# Altium PCB AVR精简学习板.PcbDoc (part 8 of 10)
Units mm, origin at the board's own origin, x right, y up, seen from the top; angles counter-clockwise.
Board outline 152.4 x 101.6 mm, 2 copper layers (Top Layer, Bottom Layer); 44 components, 51 nets, 211 pads, 6 vias.
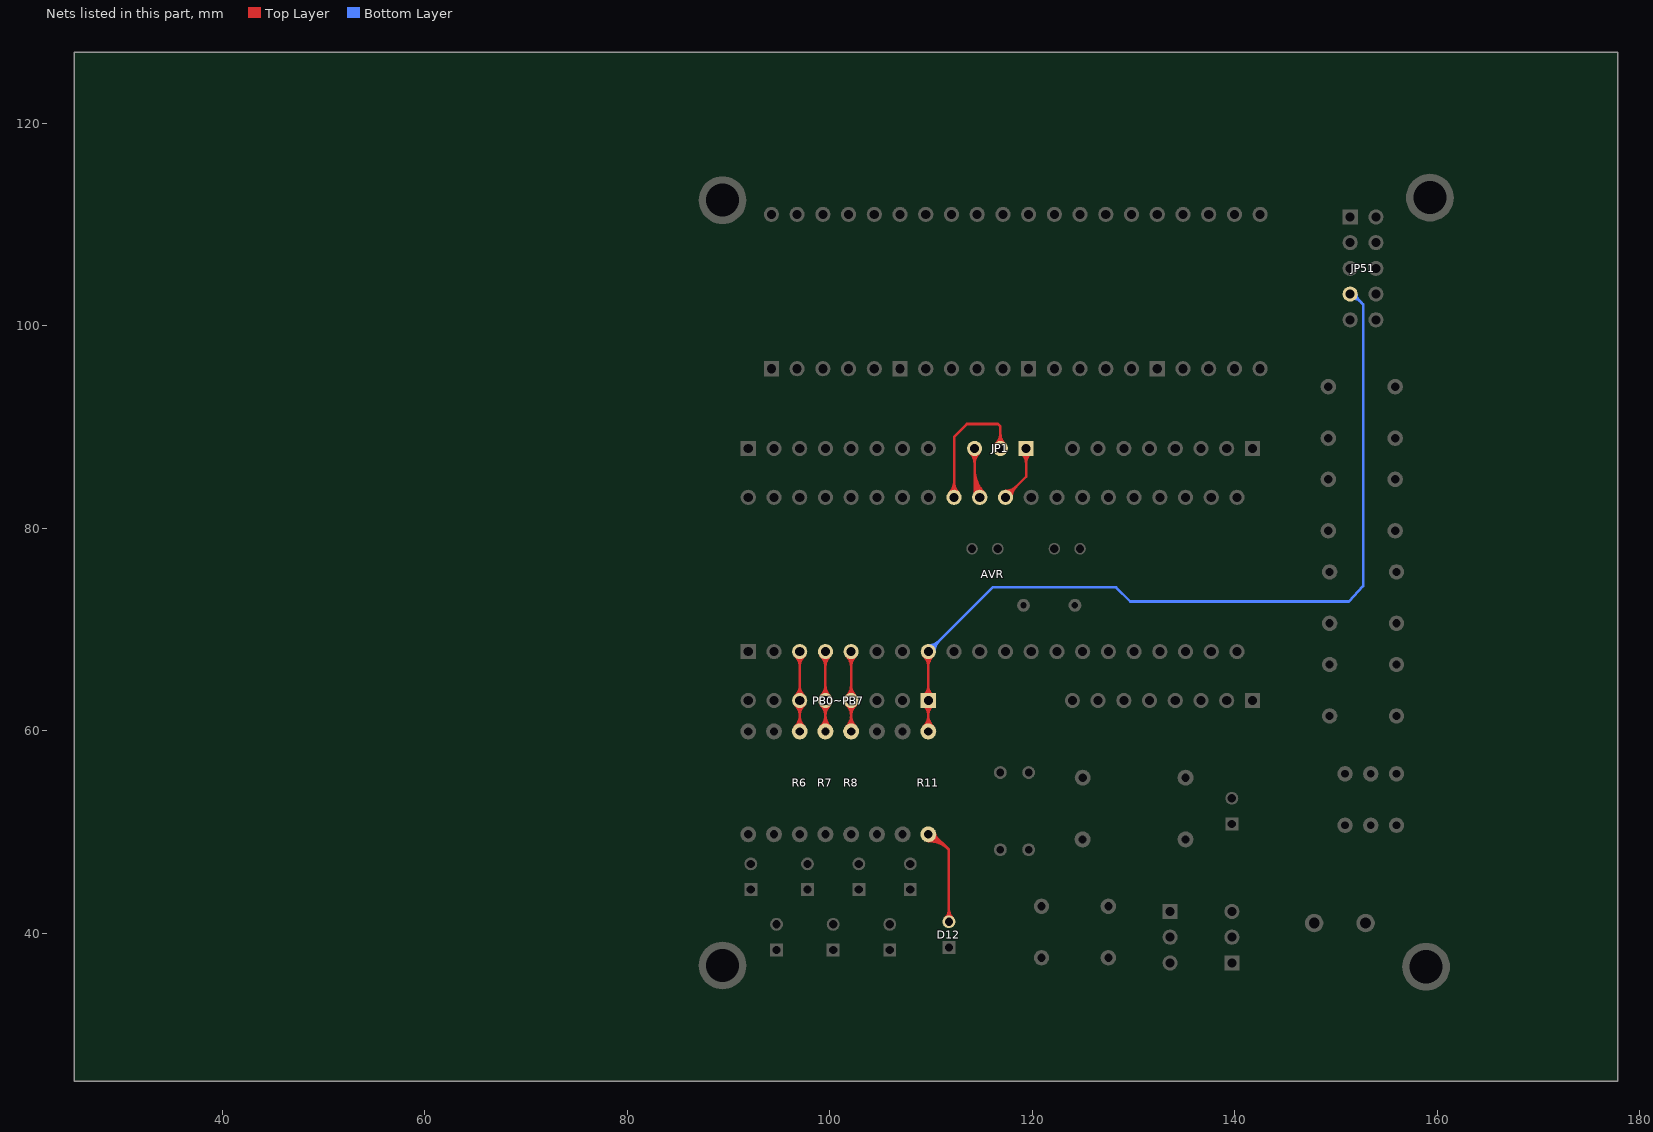
[diagram p8: the nets of this part, all layers, seen from the top]

## Via types
v1: diameter 1.27, hole 0.711, Top Layer to Bottom Layer, 6 vias

## Nets (pads, with @x,y where several pads share a name; then routed paths per layer and width w, separated by ;. In a path a pad name is that pad's centre, name@x,y a point inside that pad or via, vN(x,y) a via of type N, cw(c..) or ccw(c..) an arc to the next point about the centre after c; other vN are vias at no path point) (continued)
NetD12_2: D12.2 R11.1 | length 61.8
  Top Layer w0.254: R11.1@109.729,49.78 110.24,49.78 111.76,48.26 D12.2@111.76,41.148 ; R11.1@109.729,49.12 cw(c109.729,46.292) 111.728,48.292 ; R11.1@109.729,49.12 cw(c109.729,46.292) 111.728,48.292 ; R11.1@109.729,49.12 cw(c109.729,46.292) 111.728,48.292 ; R11.1@109.729,49.12 cw(c109.729,46.292) 111.728,48.292 ; R11.1@109.729,49.12 cw(c109.729,46.292) 111.728,48.292 ; R11.1@109.729,49.12 cw(c109.729,46.292) 111.728,48.292 ; R11.1@109.729,49.12 cw(c109.729,46.292) 111.728,48.292 ; R11.1@109.729,49.374 cw(c109.729,47.159) 111.295,48.725 ; R11.1@109.729,49.374 cw(c109.729,47.159) 111.295,48.725 ; R11.1@109.729,49.374 cw(c109.729,47.159) 111.295,48.725 ; R11.1@109.729,49.374 cw(c109.729,47.159) 111.295,48.725 ; R11.1@109.729,49.374 cw(c109.729,47.159) 111.295,48.725 ; R11.1@109.729,49.374 cw(c109.729,47.159) 111.295,48.725 ; R11.1@109.729,49.374 cw(c109.729,47.159) 111.295,48.725 ; R11.1@109.729,49.628 cw(c109.729,48.027) 110.861,49.159 ; R11.1@109.729,49.628 cw(c109.729,48.027) 110.861,49.159 ; R11.1@109.729,49.628 cw(c109.729,48.027) 110.861,49.159 ; R11.1@109.729,49.628 cw(c109.729,48.027) 110.861,49.159 ; R11.1@109.729,49.628 cw(c109.729,48.027) 110.861,49.159 ; R11.1@109.729,49.628 cw(c109.729,48.027) 110.861,49.159 ; R11.1@109.729,49.628 cw(c109.729,48.027) 110.861,49.159 ; R11.1@110.389,49.78 ccw(c110.751,49.78) 110.495,49.525 ; R11.1@110.389,49.78 ccw(c110.751,49.78) 110.495,49.525 ; R11.1@110.389,49.78 ccw(c110.751,49.78) 110.495,49.525 ; R11.1@110.389,49.78 ccw(c110.751,49.78) 110.495,49.525 ; R11.1@110.389,49.78 ccw(c110.751,49.78) 110.495,49.525 ; R11.1@110.389,49.78 ccw(c110.751,49.78) 110.495,49.525 ; R11.1@110.389,49.78 ccw(c110.751,49.78) 110.495,49.525 ; D12.2@111.401,41.507 ccw(c110.534,42.374) 111.76,42.374 ; D12.2@111.401,41.507 ccw(c110.534,42.374) 111.76,42.374 ; D12.2@111.401,41.507 ccw(c110.534,42.374) 111.76,42.374 ; D12.2@111.401,41.507 ccw(c110.534,42.374) 111.76,42.374 ; D12.2@111.401,41.507 ccw(c110.534,42.374) 111.76,42.374 ; D12.2@111.401,41.507 ccw(c110.534,42.374) 111.76,42.374 ; D12.2@111.401,41.507 ccw(c110.534,42.374) 111.76,42.374 ; 111.76,42.374 ccw(c112.986,42.374) D12.2@112.119,41.507 ; 111.76,42.374 ccw(c112.986,42.374) D12.2@112.119,41.507 ; 111.76,42.374 ccw(c112.986,42.374) D12.2@112.119,41.507 ; 111.76,42.374 ccw(c112.986,42.374) D12.2@112.119,41.507 ; 111.76,42.374 ccw(c112.986,42.374) D12.2@112.119,41.507 ; 111.76,42.374 ccw(c112.986,42.374) D12.2@112.119,41.507 ; 111.76,42.374 ccw(c112.986,42.374) D12.2@112.119,41.507
NetJP1_1: AVR.30 JP1.1 | length 58.3
  Top Layer w0.254: AVR.30@117.348,83.058 119.38,85.09 JP1.1@119.38,87.884 ; AVR.30@117.348,83.427 ccw(c117.348,84.318) 117.978,83.688 ; AVR.30@117.348,83.427 ccw(c117.348,84.318) 117.978,83.688 ; AVR.30@117.348,83.427 ccw(c117.348,84.318) 117.978,83.688 ; AVR.30@117.348,83.427 ccw(c117.348,84.318) 117.978,83.688 ; AVR.30@117.348,83.427 ccw(c117.348,84.318) 117.978,83.688 ; AVR.30@117.348,83.427 ccw(c117.348,84.318) 117.978,83.688 ; AVR.30@117.348,83.427 ccw(c117.348,84.318) 117.978,83.688 ; AVR.30@117.348,83.681 ccw(c117.348,85.185) 118.412,84.122 ; AVR.30@117.348,83.681 ccw(c117.348,85.185) 118.412,84.122 ; AVR.30@117.348,83.681 ccw(c117.348,85.185) 118.412,84.122 ; AVR.30@117.348,83.681 ccw(c117.348,85.185) 118.412,84.122 ; AVR.30@117.348,83.681 ccw(c117.348,85.185) 118.412,84.122 ; AVR.30@117.348,83.681 ccw(c117.348,85.185) 118.412,84.122 ; AVR.30@117.348,83.681 ccw(c117.348,85.185) 118.412,84.122 ; AVR.30@117.717,83.058 cw(c118.608,83.058) 117.978,83.688 ; AVR.30@117.717,83.058 cw(c118.608,83.058) 117.978,83.688 ; AVR.30@117.717,83.058 cw(c118.608,83.058) 117.978,83.688 ; AVR.30@117.717,83.058 cw(c118.608,83.058) 117.978,83.688 ; AVR.30@117.717,83.058 cw(c118.608,83.058) 117.978,83.688 ; AVR.30@117.717,83.058 cw(c118.608,83.058) 117.978,83.688 ; AVR.30@117.717,83.058 cw(c118.608,83.058) 117.978,83.688 ; AVR.30@117.971,83.058 cw(c119.475,83.058) 118.412,84.122 ; AVR.30@117.971,83.058 cw(c119.475,83.058) 118.412,84.122 ; AVR.30@117.971,83.058 cw(c119.475,83.058) 118.412,84.122 ; AVR.30@117.971,83.058 cw(c119.475,83.058) 118.412,84.122 ; AVR.30@117.971,83.058 cw(c119.475,83.058) 118.412,84.122 ; AVR.30@117.971,83.058 cw(c119.475,83.058) 118.412,84.122 ; AVR.30@117.971,83.058 cw(c119.475,83.058) 118.412,84.122 ; JP1.1@118.939,87.443 cw(c117.876,86.38) 119.38,86.38 ; JP1.1@118.939,87.443 cw(c117.876,86.38) 119.38,86.38 ; JP1.1@118.939,87.443 cw(c117.876,86.38) 119.38,86.38 ; JP1.1@118.939,87.443 cw(c117.876,86.38) 119.38,86.38 ; JP1.1@118.939,87.443 cw(c117.876,86.38) 119.38,86.38 ; JP1.1@118.939,87.443 cw(c117.876,86.38) 119.38,86.38 ; JP1.1@118.939,87.443 cw(c117.876,86.38) 119.38,86.38 ; JP1.1@119.119,87.623 cw(c118.489,86.993) 119.38,86.993 ; JP1.1@119.119,87.623 cw(c118.489,86.993) 119.38,86.993 ; JP1.1@119.119,87.623 cw(c118.489,86.993) 119.38,86.993 ; JP1.1@119.119,87.623 cw(c118.489,86.993) 119.38,86.993 ; JP1.1@119.119,87.623 cw(c118.489,86.993) 119.38,86.993 ; JP1.1@119.119,87.623 cw(c118.489,86.993) 119.38,86.993 ; JP1.1@119.119,87.623 cw(c118.489,86.993) 119.38,86.993 ; 119.38,86.38 cw(c120.884,86.38) JP1.1@119.821,87.443 ; 119.38,86.38 cw(c120.884,86.38) JP1.1@119.821,87.443 ; 119.38,86.38 cw(c120.884,86.38) JP1.1@119.821,87.443 ; 119.38,86.38 cw(c120.884,86.38) JP1.1@119.821,87.443 ; 119.38,86.38 cw(c120.884,86.38) JP1.1@119.821,87.443 ; 119.38,86.38 cw(c120.884,86.38) JP1.1@119.821,87.443 ; 119.38,86.38 cw(c120.884,86.38) JP1.1@119.821,87.443 ; 119.38,86.993 cw(c120.271,86.993) JP1.1@119.641,87.623 ; 119.38,86.993 cw(c120.271,86.993) JP1.1@119.641,87.623 ; 119.38,86.993 cw(c120.271,86.993) JP1.1@119.641,87.623 ; 119.38,86.993 cw(c120.271,86.993) JP1.1@119.641,87.623 ; 119.38,86.993 cw(c120.271,86.993) JP1.1@119.641,87.623 ; 119.38,86.993 cw(c120.271,86.993) JP1.1@119.641,87.623 ; 119.38,86.993 cw(c120.271,86.993) JP1.1@119.641,87.623
NetJP1_2: AVR.32 JP1.2 | length 66
  Top Layer w0.254: AVR.32@112.268,83.058 112.268,89.027 113.538,90.297 116.586,90.297 116.84,90.043 JP1.2@116.84,87.884 ; AVR.32@111.827,83.499 ccw(c110.764,84.562) 112.268,84.562 ; AVR.32@111.827,83.499 ccw(c110.764,84.562) 112.268,84.562 ; AVR.32@111.827,83.499 ccw(c110.764,84.562) 112.268,84.562 ; AVR.32@111.827,83.499 ccw(c110.764,84.562) 112.268,84.562 ; AVR.32@111.827,83.499 ccw(c110.764,84.562) 112.268,84.562 ; AVR.32@111.827,83.499 ccw(c110.764,84.562) 112.268,84.562 ; AVR.32@111.827,83.499 ccw(c110.764,84.562) 112.268,84.562 ; AVR.32@112.007,83.319 ccw(c111.377,83.949) 112.268,83.949 ; AVR.32@112.007,83.319 ccw(c111.377,83.949) 112.268,83.949 ; AVR.32@112.007,83.319 ccw(c111.377,83.949) 112.268,83.949 ; AVR.32@112.007,83.319 ccw(c111.377,83.949) 112.268,83.949 ; AVR.32@112.007,83.319 ccw(c111.377,83.949) 112.268,83.949 ; AVR.32@112.007,83.319 ccw(c111.377,83.949) 112.268,83.949 ; AVR.32@112.007,83.319 ccw(c111.377,83.949) 112.268,83.949 ; 112.268,83.949 ccw(c113.159,83.949) AVR.32@112.529,83.319 ; 112.268,83.949 ccw(c113.159,83.949) AVR.32@112.529,83.319 ; 112.268,83.949 ccw(c113.159,83.949) AVR.32@112.529,83.319 ; 112.268,83.949 ccw(c113.159,83.949) AVR.32@112.529,83.319 ; 112.268,83.949 ccw(c113.159,83.949) AVR.32@112.529,83.319 ; 112.268,83.949 ccw(c113.159,83.949) AVR.32@112.529,83.319 ; 112.268,83.949 ccw(c113.159,83.949) AVR.32@112.529,83.319 ; 112.268,84.562 ccw(c113.772,84.562) AVR.32@112.709,83.499 ; 112.268,84.562 ccw(c113.772,84.562) AVR.32@112.709,83.499 ; 112.268,84.562 ccw(c113.772,84.562) AVR.32@112.709,83.499 ; 112.268,84.562 ccw(c113.772,84.562) AVR.32@112.709,83.499 ; 112.268,84.562 ccw(c113.772,84.562) AVR.32@112.709,83.499 ; 112.268,84.562 ccw(c113.772,84.562) AVR.32@112.709,83.499 ; 112.268,84.562 ccw(c113.772,84.562) AVR.32@112.709,83.499 ; JP1.2@116.399,88.325 ccw(c115.336,89.388) 116.84,89.388 ; JP1.2@116.399,88.325 ccw(c115.336,89.388) 116.84,89.388 ; JP1.2@116.399,88.325 ccw(c115.336,89.388) 116.84,89.388 ; JP1.2@116.399,88.325 ccw(c115.336,89.388) 116.84,89.388 ; JP1.2@116.399,88.325 ccw(c115.336,89.388) 116.84,89.388 ; JP1.2@116.399,88.325 ccw(c115.336,89.388) 116.84,89.388 ; JP1.2@116.399,88.325 ccw(c115.336,89.388) 116.84,89.388 ; JP1.2@116.579,88.145 ccw(c115.949,88.775) 116.84,88.775 ; JP1.2@116.579,88.145 ccw(c115.949,88.775) 116.84,88.775 ; JP1.2@116.579,88.145 ccw(c115.949,88.775) 116.84,88.775 ; JP1.2@116.579,88.145 ccw(c115.949,88.775) 116.84,88.775 ; JP1.2@116.579,88.145 ccw(c115.949,88.775) 116.84,88.775 ; JP1.2@116.579,88.145 ccw(c115.949,88.775) 116.84,88.775 ; JP1.2@116.579,88.145 ccw(c115.949,88.775) 116.84,88.775 ; 116.84,88.775 ccw(c117.731,88.775) JP1.2@117.101,88.145 ; 116.84,88.775 ccw(c117.731,88.775) JP1.2@117.101,88.145 ; 116.84,88.775 ccw(c117.731,88.775) JP1.2@117.101,88.145 ; 116.84,88.775 ccw(c117.731,88.775) JP1.2@117.101,88.145 ; 116.84,88.775 ccw(c117.731,88.775) JP1.2@117.101,88.145 ; 116.84,88.775 ccw(c117.731,88.775) JP1.2@117.101,88.145 ; 116.84,88.775 ccw(c117.731,88.775) JP1.2@117.101,88.145 ; 116.84,89.388 ccw(c118.344,89.388) JP1.2@117.281,88.325 ; 116.84,89.388 ccw(c118.344,89.388) JP1.2@117.281,88.325 ; 116.84,89.388 ccw(c118.344,89.388) JP1.2@117.281,88.325 ; 116.84,89.388 ccw(c118.344,89.388) JP1.2@117.281,88.325 ; 116.84,89.388 ccw(c118.344,89.388) JP1.2@117.281,88.325 ; 116.84,89.388 ccw(c118.344,89.388) JP1.2@117.281,88.325 ; 116.84,89.388 ccw(c118.344,89.388) JP1.2@117.281,88.325
NetJP1_3: AVR.31 JP1.3 | length 82.4
  Top Layer w0.254: JP1.3@114.3,87.884 114.3,83.566 AVR.31@114.808,83.058 ; JP1.3@113.859,87.443 cw(c112.796,86.38) 114.3,86.38 ; JP1.3@113.859,87.443 cw(c112.796,86.38) 114.3,86.38 ; JP1.3@113.859,87.443 cw(c112.796,86.38) 114.3,86.38 ; JP1.3@113.859,87.443 cw(c112.796,86.38) 114.3,86.38 ; JP1.3@113.859,87.443 cw(c112.796,86.38) 114.3,86.38 ; JP1.3@113.859,87.443 cw(c112.796,86.38) 114.3,86.38 ; JP1.3@113.859,87.443 cw(c112.796,86.38) 114.3,86.38 ; JP1.3@114.039,87.623 cw(c113.409,86.993) 114.3,86.993 ; JP1.3@114.039,87.623 cw(c113.409,86.993) 114.3,86.993 ; JP1.3@114.039,87.623 cw(c113.409,86.993) 114.3,86.993 ; JP1.3@114.039,87.623 cw(c113.409,86.993) 114.3,86.993 ; JP1.3@114.039,87.623 cw(c113.409,86.993) 114.3,86.993 ; JP1.3@114.039,87.623 cw(c113.409,86.993) 114.3,86.993 ; JP1.3@114.039,87.623 cw(c113.409,86.993) 114.3,86.993 ; 114.3,83.949 ccw(c115.699,83.949) AVR.31@114.71,82.96 ; 114.3,83.949 ccw(c115.699,83.949) AVR.31@114.71,82.96 ; 114.3,83.949 ccw(c115.699,83.949) AVR.31@114.71,82.96 ; 114.3,83.949 ccw(c115.699,83.949) AVR.31@114.71,82.96 ; 114.3,83.949 ccw(c115.699,83.949) AVR.31@114.71,82.96 ; 114.3,83.949 ccw(c115.699,83.949) AVR.31@114.71,82.96 ; 114.3,83.949 ccw(c115.699,83.949) AVR.31@114.71,82.96 ; 114.3,84.562 ccw(c116.312,84.562) AVR.31@114.889,83.139 ; 114.3,84.562 ccw(c116.312,84.562) AVR.31@114.889,83.139 ; 114.3,84.562 ccw(c116.312,84.562) AVR.31@114.889,83.139 ; 114.3,84.562 ccw(c116.312,84.562) AVR.31@114.889,83.139 ; 114.3,84.562 ccw(c116.312,84.562) AVR.31@114.889,83.139 ; 114.3,84.562 ccw(c116.312,84.562) AVR.31@114.889,83.139 ; 114.3,84.562 ccw(c116.312,84.562) AVR.31@114.889,83.139 ; 114.3,85.175 ccw(c116.925,85.175) AVR.31@115.069,83.319 ; 114.3,85.175 ccw(c116.925,85.175) AVR.31@115.069,83.319 ; 114.3,85.175 ccw(c116.925,85.175) AVR.31@115.069,83.319 ; 114.3,85.175 ccw(c116.925,85.175) AVR.31@115.069,83.319 ; 114.3,85.175 ccw(c116.925,85.175) AVR.31@115.069,83.319 ; 114.3,85.175 ccw(c116.925,85.175) AVR.31@115.069,83.319 ; 114.3,85.175 ccw(c116.925,85.175) AVR.31@115.069,83.319 ; 114.3,85.788 ccw(c117.538,85.788) AVR.31@115.249,83.499 ; 114.3,85.788 ccw(c117.538,85.788) AVR.31@115.249,83.499 ; 114.3,85.788 ccw(c117.538,85.788) AVR.31@115.249,83.499 ; 114.3,85.788 ccw(c117.538,85.788) AVR.31@115.249,83.499 ; 114.3,85.788 ccw(c117.538,85.788) AVR.31@115.249,83.499 ; 114.3,85.788 ccw(c117.538,85.788) AVR.31@115.249,83.499 ; 114.3,85.788 ccw(c117.538,85.788) AVR.31@115.249,83.499 ; 114.3,86.38 cw(c115.804,86.38) JP1.3@114.741,87.443 ; 114.3,86.38 cw(c115.804,86.38) JP1.3@114.741,87.443 ; 114.3,86.38 cw(c115.804,86.38) JP1.3@114.741,87.443 ; 114.3,86.38 cw(c115.804,86.38) JP1.3@114.741,87.443 ; 114.3,86.38 cw(c115.804,86.38) JP1.3@114.741,87.443 ; 114.3,86.38 cw(c115.804,86.38) JP1.3@114.741,87.443 ; 114.3,86.38 cw(c115.804,86.38) JP1.3@114.741,87.443 ; 114.3,86.993 cw(c115.191,86.993) JP1.3@114.561,87.623 ; 114.3,86.993 cw(c115.191,86.993) JP1.3@114.561,87.623 ; 114.3,86.993 cw(c115.191,86.993) JP1.3@114.561,87.623 ; 114.3,86.993 cw(c115.191,86.993) JP1.3@114.561,87.623 ; 114.3,86.993 cw(c115.191,86.993) JP1.3@114.561,87.623 ; 114.3,86.993 cw(c115.191,86.993) JP1.3@114.561,87.623 ; 114.3,86.993 cw(c115.191,86.993) JP1.3@114.561,87.623
NetJP2_1: AVR.8 JP51.7 PB0~PB7.1 R11.2 | length 236
  Top Layer w0.254: AVR.8@109.728,67.818 PB0~PB7.1@109.728,62.992 PB0~PB7.1@109.728,62.992 R11.2@109.729,59.94 ; R11.2@109.262,60.407 ccw(c108.135,61.535) 109.729,61.535 ; R11.2@109.262,60.407 ccw(c108.135,61.535) 109.729,61.535 ; R11.2@109.262,60.407 ccw(c108.135,61.535) 109.729,61.535 ; R11.2@109.262,60.407 ccw(c108.135,61.535) 109.729,61.535 ; R11.2@109.262,60.407 ccw(c108.135,61.535) 109.729,61.535 ; R11.2@109.262,60.407 ccw(c108.135,61.535) 109.729,61.535 ; R11.2@109.262,60.407 ccw(c108.135,61.535) 109.729,61.535 ; PB0~PB7.1@109.287,62.551 cw(c108.222,61.486) 109.729,61.486 ; PB0~PB7.1@109.287,62.551 cw(c108.222,61.486) 109.729,61.486 ; PB0~PB7.1@109.287,62.551 cw(c108.222,61.486) 109.729,61.486 ; PB0~PB7.1@109.287,62.551 cw(c108.222,61.486) 109.729,61.486 ; PB0~PB7.1@109.287,62.551 cw(c108.222,61.486) 109.729,61.486 ; PB0~PB7.1@109.287,62.551 cw(c108.222,61.486) 109.729,61.486 ; PB0~PB7.1@109.287,62.551 cw(c108.222,61.486) 109.729,61.486 ; PB0~PB7.1@109.287,63.433 ccw(c108.224,64.496) 109.728,64.496 ; PB0~PB7.1@109.287,63.433 ccw(c108.224,64.496) 109.728,64.496 ; PB0~PB7.1@109.287,63.433 ccw(c108.224,64.496) 109.728,64.496 ; PB0~PB7.1@109.287,63.433 ccw(c108.224,64.496) 109.728,64.496 ; PB0~PB7.1@109.287,63.433 ccw(c108.224,64.496) 109.728,64.496 ; PB0~PB7.1@109.287,63.433 ccw(c108.224,64.496) 109.728,64.496 ; PB0~PB7.1@109.287,63.433 ccw(c108.224,64.496) 109.728,64.496 ; AVR.8@109.287,67.377 cw(c108.224,66.314) 109.728,66.314 ; AVR.8@109.287,67.377 cw(c108.224,66.314) 109.728,66.314 ; AVR.8@109.287,67.377 cw(c108.224,66.314) 109.728,66.314 ; AVR.8@109.287,67.377 cw(c108.224,66.314) 109.728,66.314 ; AVR.8@109.287,67.377 cw(c108.224,66.314) 109.728,66.314 ; AVR.8@109.287,67.377 cw(c108.224,66.314) 109.728,66.314 ; AVR.8@109.287,67.377 cw(c108.224,66.314) 109.728,66.314 ; R11.2@109.442,60.228 ccw(c108.748,60.921) 109.729,60.921 ; R11.2@109.442,60.228 ccw(c108.748,60.921) 109.729,60.921 ; R11.2@109.442,60.228 ccw(c108.748,60.921) 109.729,60.921 ; R11.2@109.442,60.228 ccw(c108.748,60.921) 109.729,60.921 ; R11.2@109.442,60.228 ccw(c108.748,60.921) 109.729,60.921 ; R11.2@109.442,60.228 ccw(c108.748,60.921) 109.729,60.921 ; R11.2@109.442,60.228 ccw(c108.748,60.921) 109.729,60.921 ; PB0~PB7.1@109.467,62.731 cw(c108.835,62.099) 109.729,62.099 ; PB0~PB7.1@109.467,62.731 cw(c108.835,62.099) 109.729,62.099 ; PB0~PB7.1@109.467,62.731 cw(c108.835,62.099) 109.729,62.099 ; PB0~PB7.1@109.467,62.731 cw(c108.835,62.099) 109.729,62.099 ; PB0~PB7.1@109.467,62.731 cw(c108.835,62.099) 109.729,62.099 ; PB0~PB7.1@109.467,62.731 cw(c108.835,62.099) 109.729,62.099 ; PB0~PB7.1@109.467,62.731 cw(c108.835,62.099) 109.729,62.099 ; PB0~PB7.1@109.467,63.253 ccw(c108.837,63.883) 109.728,63.883 ; PB0~PB7.1@109.467,63.253 ccw(c108.837,63.883) 109.728,63.883 ; PB0~PB7.1@109.467,63.253 ccw(c108.837,63.883) 109.728,63.883 ; PB0~PB7.1@109.467,63.253 ccw(c108.837,63.883) 109.728,63.883 ; PB0~PB7.1@109.467,63.253 ccw(c108.837,63.883) 109.728,63.883 ; PB0~PB7.1@109.467,63.253 ccw(c108.837,63.883) 109.728,63.883 ; PB0~PB7.1@109.467,63.253 ccw(c108.837,63.883) 109.728,63.883 ; AVR.8@109.467,67.557 cw(c108.837,66.927) 109.728,66.927 ; AVR.8@109.467,67.557 cw(c108.837,66.927) 109.728,66.927 ; AVR.8@109.467,67.557 cw(c108.837,66.927) 109.728,66.927 ; AVR.8@109.467,67.557 cw(c108.837,66.927) 109.728,66.927 ; AVR.8@109.467,67.557 cw(c108.837,66.927) 109.728,66.927 ; AVR.8@109.467,67.557 cw(c108.837,66.927) 109.728,66.927 ; AVR.8@109.467,67.557 cw(c108.837,66.927) 109.728,66.927 ; 109.728,63.883 ccw(c110.619,63.883) PB0~PB7.1@109.989,63.253 ; 109.728,63.883 ccw(c110.619,63.883) PB0~PB7.1@109.989,63.253 ; 109.728,63.883 ccw(c110.619,63.883) PB0~PB7.1@109.989,63.253 ; 109.728,63.883 ccw(c110.619,63.883) PB0~PB7.1@109.989,63.253 ; 109.728,63.883 ccw(c110.619,63.883) PB0~PB7.1@109.989,63.253 ; 109.728,63.883 ccw(c110.619,63.883) PB0~PB7.1@109.989,63.253 ; 109.728,63.883 ccw(c110.619,63.883) PB0~PB7.1@109.989,63.253 ; 109.728,64.496 ccw(c111.232,64.496) PB0~PB7.1@110.169,63.433 ; 109.728,64.496 ccw(c111.232,64.496) PB0~PB7.1@110.169,63.433 ; 109.728,64.496 ccw(c111.232,64.496) PB0~PB7.1@110.169,63.433 ; 109.728,64.496 ccw(c111.232,64.496) PB0~PB7.1@110.169,63.433 ; 109.728,64.496 ccw(c111.232,64.496) PB0~PB7.1@110.169,63.433 ; 109.728,64.496 ccw(c111.232,64.496) PB0~PB7.1@110.169,63.433 ; 109.728,64.496 ccw(c111.232,64.496) PB0~PB7.1@110.169,63.433 ; 109.728,66.314 cw(c111.232,66.314) AVR.8@110.169,67.377 ; 109.728,66.314 cw(c111.232,66.314) AVR.8@110.169,67.377 ; 109.728,66.314 cw(c111.232,66.314) AVR.8@110.169,67.377 ; 109.728,66.314 cw(c111.232,66.314) AVR.8@110.169,67.377 ; 109.728,66.314 cw(c111.232,66.314) AVR.8@110.169,67.377 ; 109.728,66.314 cw(c111.232,66.314) AVR.8@110.169,67.377 ; 109.728,66.314 cw(c111.232,66.314) AVR.8@110.169,67.377 ; 109.728,66.927 cw(c110.619,66.927) AVR.8@109.989,67.557 ; 109.728,66.927 cw(c110.619,66.927) AVR.8@109.989,67.557 ; 109.728,66.927 cw(c110.619,66.927) AVR.8@109.989,67.557 ; 109.728,66.927 cw(c110.619,66.927) AVR.8@109.989,67.557 ; 109.728,66.927 cw(c110.619,66.927) AVR.8@109.989,67.557 ; 109.728,66.927 cw(c110.619,66.927) AVR.8@109.989,67.557 ; 109.728,66.927 cw(c110.619,66.927) AVR.8@109.989,67.557 ; 109.729,60.921 ccw(c110.71,60.921) R11.2@110.016,60.228 ; 109.729,60.921 ccw(c110.71,60.921) R11.2@110.016,60.228 ; 109.729,60.921 ccw(c110.71,60.921) R11.2@110.016,60.228 ; 109.729,60.921 ccw(c110.71,60.921) R11.2@110.016,60.228 ; 109.729,60.921 ccw(c110.71,60.921) R11.2@110.016,60.228 ; 109.729,60.921 ccw(c110.71,60.921) R11.2@110.016,60.228 ; 109.729,60.921 ccw(c110.71,60.921) R11.2@110.016,60.228 ; 109.729,61.49 cw(c111.23,61.49) PB0~PB7.1@110.169,62.551 ; 109.729,61.49 cw(c111.23,61.49) PB0~PB7.1@110.169,62.551 ; 109.729,61.49 cw(c111.23,61.49) PB0~PB7.1@110.169,62.551 ; 109.729,61.49 cw(c111.23,61.49) PB0~PB7.1@110.169,62.551 ; 109.729,61.49 cw(c111.23,61.49) PB0~PB7.1@110.169,62.551 ; 109.729,61.49 cw(c111.23,61.49) PB0~PB7.1@110.169,62.551 ; 109.729,61.49 cw(c111.23,61.49) PB0~PB7.1@110.169,62.551 ; 109.729,61.535 ccw(c111.323,61.535) R11.2@110.196,60.407 ; 109.729,61.535 ccw(c111.323,61.535) R11.2@110.196,60.407 ; 109.729,61.535 ccw(c111.323,61.535) R11.2@110.196,60.407 ; 109.729,61.535 ccw(c111.323,61.535) R11.2@110.196,60.407 ; 109.729,61.535 ccw(c111.323,61.535) R11.2@110.196,60.407 ; 109.729,61.535 ccw(c111.323,61.535) R11.2@110.196,60.407 ; 109.729,61.535 ccw(c111.323,61.535) R11.2@110.196,60.407 ; 109.729,62.104 cw(c110.616,62.104) PB0~PB7.1@109.989,62.731 ; 109.729,62.104 cw(c110.616,62.104) PB0~PB7.1@109.989,62.731 ; 109.729,62.104 cw(c110.616,62.104) PB0~PB7.1@109.989,62.731 ; 109.729,62.104 cw(c110.616,62.104) PB0~PB7.1@109.989,62.731 ; 109.729,62.104 cw(c110.616,62.104) PB0~PB7.1@109.989,62.731 ; 109.729,62.104 cw(c110.616,62.104) PB0~PB7.1@109.989,62.731 ; 109.729,62.104 cw(c110.616,62.104) PB0~PB7.1@109.989,62.731
  Bottom Layer w0.254: AVR.8@109.728,67.818 116.078,74.168 128.27,74.168 129.667,72.771 151.257,72.771 152.654,74.295 152.654,102.108 151.638,103.251 151.765,103.124 JP51.7@151.384,103.124 ; AVR.8@109.728,68.187 ccw(c109.728,69.078) 110.358,68.448 ; AVR.8@109.728,68.187 ccw(c109.728,69.078) 110.358,68.448 ; AVR.8@109.728,68.187 ccw(c109.728,69.078) 110.358,68.448 ; AVR.8@109.728,68.187 ccw(c109.728,69.078) 110.358,68.448 ; AVR.8@109.728,68.187 ccw(c109.728,69.078) 110.358,68.448 ; AVR.8@109.728,68.187 ccw(c109.728,69.078) 110.358,68.448 ; AVR.8@109.728,68.187 ccw(c109.728,69.078) 110.358,68.448 ; AVR.8@109.728,68.441 ccw(c109.728,69.945) 110.792,68.882 ; AVR.8@109.728,68.441 ccw(c109.728,69.945) 110.792,68.882 ; AVR.8@109.728,68.441 ccw(c109.728,69.945) 110.792,68.882 ; AVR.8@109.728,68.441 ccw(c109.728,69.945) 110.792,68.882 ; AVR.8@109.728,68.441 ccw(c109.728,69.945) 110.792,68.882 ; AVR.8@109.728,68.441 ccw(c109.728,69.945) 110.792,68.882 ; AVR.8@109.728,68.441 ccw(c109.728,69.945) 110.792,68.882 ; AVR.8@110.097,67.818 cw(c110.988,67.818) 110.358,68.448 ; AVR.8@110.097,67.818 cw(c110.988,67.818) 110.358,68.448 ; AVR.8@110.097,67.818 cw(c110.988,67.818) 110.358,68.448 ; AVR.8@110.097,67.818 cw(c110.988,67.818) 110.358,68.448 ; AVR.8@110.097,67.818 cw(c110.988,67.818) 110.358,68.448 ; AVR.8@110.097,67.818 cw(c110.988,67.818) 110.358,68.448 ; AVR.8@110.097,67.818 cw(c110.988,67.818) 110.358,68.448 ; AVR.8@110.351,67.818 cw(c111.855,67.818) 110.792,68.882 ; AVR.8@110.351,67.818 cw(c111.855,67.818) 110.792,68.882 ; AVR.8@110.351,67.818 cw(c111.855,67.818) 110.792,68.882 ; AVR.8@110.351,67.818 cw(c111.855,67.818) 110.792,68.882 ; AVR.8@110.351,67.818 cw(c111.855,67.818) 110.792,68.882 ; AVR.8@110.351,67.818 cw(c111.855,67.818) 110.792,68.882 ; AVR.8@110.351,67.818 cw(c111.855,67.818) 110.792,68.882 ; JP51.7@151.388,103.009 cw(c151.42,102.047) 152.14,102.686 ; JP51.7@151.388,103.009 cw(c151.42,102.047) 152.14,102.686 ; JP51.7@151.388,103.009 cw(c151.42,102.047) 152.14,102.686 ; JP51.7@151.388,103.009 cw(c151.42,102.047) 152.14,102.686 ; JP51.7@151.388,103.009 cw(c151.42,102.047) 152.14,102.686 ; JP51.7@151.388,103.009 cw(c151.42,102.047) 152.14,102.686 ; JP51.7@151.388,103.009 cw(c151.42,102.047) 152.14,102.686 ; JP51.7@151.396,102.755 cw(c151.444,101.344) 152.499,102.282 ; JP51.7@151.396,102.755 cw(c151.444,101.344) 152.499,102.282 ; JP51.7@151.396,102.755 cw(c151.444,101.344) 152.499,102.282 ; JP51.7@151.396,102.755 cw(c151.444,101.344) 152.499,102.282 ; JP51.7@151.396,102.755 cw(c151.444,101.344) 152.499,102.282 ; JP51.7@151.396,102.755 cw(c151.444,101.344) 152.499,102.282 ; JP51.7@151.396,102.755 cw(c151.444,101.344) 152.499,102.282 ; JP51.7@152.006,103.087 ccw(c152.573,103.054) 152.148,102.677 ; JP51.7@152.006,103.087 ccw(c152.573,103.054) 152.148,102.677 ; JP51.7@152.006,103.087 ccw(c152.573,103.054) 152.148,102.677 ; JP51.7@152.006,103.087 ccw(c152.573,103.054) 152.148,102.677 ; JP51.7@152.006,103.087 ccw(c152.573,103.054) 152.148,102.677 ; JP51.7@152.006,103.087 ccw(c152.573,103.054) 152.148,102.677 ; JP51.7@152.006,103.087 ccw(c152.573,103.054) 152.148,102.677
NetJP2_4: AVR.5 PB0~PB7.4 R8.2 | length 115.2
  Top Layer w0.254: AVR.5@102.108,67.818 PB0~PB7.4@102.108,62.992 PB0~PB7.4@102.108,62.992 R8.2@102.109,59.94 ; R8.2@101.642,60.407 ccw(c100.515,61.535) 102.109,61.535 ; R8.2@101.642,60.407 ccw(c100.515,61.535) 102.109,61.535 ; R8.2@101.642,60.407 ccw(c100.515,61.535) 102.109,61.535 ; R8.2@101.642,60.407 ccw(c100.515,61.535) 102.109,61.535 ; R8.2@101.642,60.407 ccw(c100.515,61.535) 102.109,61.535 ; R8.2@101.642,60.407 ccw(c100.515,61.535) 102.109,61.535 ; R8.2@101.642,60.407 ccw(c100.515,61.535) 102.109,61.535 ; PB0~PB7.4@101.667,62.551 cw(c100.602,61.486) 102.109,61.486 ; PB0~PB7.4@101.667,62.551 cw(c100.602,61.486) 102.109,61.486 ; PB0~PB7.4@101.667,62.551 cw(c100.602,61.486) 102.109,61.486 ; PB0~PB7.4@101.667,62.551 cw(c100.602,61.486) 102.109,61.486 ; PB0~PB7.4@101.667,62.551 cw(c100.602,61.486) 102.109,61.486 ; PB0~PB7.4@101.667,62.551 cw(c100.602,61.486) 102.109,61.486 ; PB0~PB7.4@101.667,62.551 cw(c100.602,61.486) 102.109,61.486 ; PB0~PB7.4@101.667,63.433 ccw(c100.604,64.496) 102.108,64.496 ; PB0~PB7.4@101.667,63.433 ccw(c100.604,64.496) 102.108,64.496 ; PB0~PB7.4@101.667,63.433 ccw(c100.604,64.496) 102.108,64.496 ; PB0~PB7.4@101.667,63.433 ccw(c100.604,64.496) 102.108,64.496 ; PB0~PB7.4@101.667,63.433 ccw(c100.604,64.496) 102.108,64.496 ; PB0~PB7.4@101.667,63.433 ccw(c100.604,64.496) 102.108,64.496 ; PB0~PB7.4@101.667,63.433 ccw(c100.604,64.496) 102.108,64.496 ; AVR.5@101.667,67.377 cw(c100.604,66.314) 102.108,66.314 ; AVR.5@101.667,67.377 cw(c100.604,66.314) 102.108,66.314 ; AVR.5@101.667,67.377 cw(c100.604,66.314) 102.108,66.314 ; AVR.5@101.667,67.377 cw(c100.604,66.314) 102.108,66.314 ; AVR.5@101.667,67.377 cw(c100.604,66.314) 102.108,66.314 ; AVR.5@101.667,67.377 cw(c100.604,66.314) 102.108,66.314 ; AVR.5@101.667,67.377 cw(c100.604,66.314) 102.108,66.314 ; R8.2@101.822,60.228 ccw(c101.128,60.921) 102.109,60.921 ; R8.2@101.822,60.228 ccw(c101.128,60.921) 102.109,60.921 ; R8.2@101.822,60.228 ccw(c101.128,60.921) 102.109,60.921 ; R8.2@101.822,60.228 ccw(c101.128,60.921) 102.109,60.921 ; R8.2@101.822,60.228 ccw(c101.128,60.921) 102.109,60.921 ; R8.2@101.822,60.228 ccw(c101.128,60.921) 102.109,60.921 ; R8.2@101.822,60.228 ccw(c101.128,60.921) 102.109,60.921 ; PB0~PB7.4@101.847,62.731 cw(c101.215,62.099) 102.109,62.099 ; PB0~PB7.4@101.847,62.731 cw(c101.215,62.099) 102.109,62.099 ; PB0~PB7.4@101.847,62.731 cw(c101.215,62.099) 102.109,62.099 ; PB0~PB7.4@101.847,62.731 cw(c101.215,62.099) 102.109,62.099 ; PB0~PB7.4@101.847,62.731 cw(c101.215,62.099) 102.109,62.099 ; PB0~PB7.4@101.847,62.731 cw(c101.215,62.099) 102.109,62.099 ; PB0~PB7.4@101.847,62.731 cw(c101.215,62.099) 102.109,62.099 ; PB0~PB7.4@101.847,63.253 ccw(c101.217,63.883) 102.108,63.883 ; PB0~PB7.4@101.847,63.253 ccw(c101.217,63.883) 102.108,63.883 ; PB0~PB7.4@101.847,63.253 ccw(c101.217,63.883) 102.108,63.883 ; PB0~PB7.4@101.847,63.253 ccw(c101.217,63.883) 102.108,63.883 ; PB0~PB7.4@101.847,63.253 ccw(c101.217,63.883) 102.108,63.883 ; PB0~PB7.4@101.847,63.253 ccw(c101.217,63.883) 102.108,63.883 ; PB0~PB7.4@101.847,63.253 ccw(c101.217,63.883) 102.108,63.883 ; AVR.5@101.847,67.557 cw(c101.217,66.927) 102.108,66.927 ; AVR.5@101.847,67.557 cw(c101.217,66.927) 102.108,66.927 ; AVR.5@101.847,67.557 cw(c101.217,66.927) 102.108,66.927 ; AVR.5@101.847,67.557 cw(c101.217,66.927) 102.108,66.927 ; AVR.5@101.847,67.557 cw(c101.217,66.927) 102.108,66.927 ; AVR.5@101.847,67.557 cw(c101.217,66.927) 102.108,66.927 ; AVR.5@101.847,67.557 cw(c101.217,66.927) 102.108,66.927 ; 102.108,63.883 ccw(c102.999,63.883) PB0~PB7.4@102.369,63.253 ; 102.108,63.883 ccw(c102.999,63.883) PB0~PB7.4@102.369,63.253 ; 102.108,63.883 ccw(c102.999,63.883) PB0~PB7.4@102.369,63.253 ; 102.108,63.883 ccw(c102.999,63.883) PB0~PB7.4@102.369,63.253 ; 102.108,63.883 ccw(c102.999,63.883) PB0~PB7.4@102.369,63.253 ; 102.108,63.883 ccw(c102.999,63.883) PB0~PB7.4@102.369,63.253 ; 102.108,63.883 ccw(c102.999,63.883) PB0~PB7.4@102.369,63.253 ; 102.108,64.496 ccw(c103.612,64.496) PB0~PB7.4@102.549,63.433 ; 102.108,64.496 ccw(c103.612,64.496) PB0~PB7.4@102.549,63.433 ; 102.108,64.496 ccw(c103.612,64.496) PB0~PB7.4@102.549,63.433 ; 102.108,64.496 ccw(c103.612,64.496) PB0~PB7.4@102.549,63.433 ; 102.108,64.496 ccw(c103.612,64.496) PB0~PB7.4@102.549,63.433 ; 102.108,64.496 ccw(c103.612,64.496) PB0~PB7.4@102.549,63.433 ; 102.108,64.496 ccw(c103.612,64.496) PB0~PB7.4@102.549,63.433 ; 102.108,66.314 cw(c103.612,66.314) AVR.5@102.549,67.377 ; 102.108,66.314 cw(c103.612,66.314) AVR.5@102.549,67.377 ; 102.108,66.314 cw(c103.612,66.314) AVR.5@102.549,67.377 ; 102.108,66.314 cw(c103.612,66.314) AVR.5@102.549,67.377 ; 102.108,66.314 cw(c103.612,66.314) AVR.5@102.549,67.377 ; 102.108,66.314 cw(c103.612,66.314) AVR.5@102.549,67.377 ; 102.108,66.314 cw(c103.612,66.314) AVR.5@102.549,67.377 ; 102.108,66.927 cw(c102.999,66.927) AVR.5@102.369,67.557 ; 102.108,66.927 cw(c102.999,66.927) AVR.5@102.369,67.557 ; 102.108,66.927 cw(c102.999,66.927) AVR.5@102.369,67.557 ; 102.108,66.927 cw(c102.999,66.927) AVR.5@102.369,67.557 ; 102.108,66.927 cw(c102.999,66.927) AVR.5@102.369,67.557 ; 102.108,66.927 cw(c102.999,66.927) AVR.5@102.369,67.557 ; 102.108,66.927 cw(c102.999,66.927) AVR.5@102.369,67.557 ; 102.109,60.921 ccw(c103.09,60.921) R8.2@102.396,60.228 ; 102.109,60.921 ccw(c103.09,60.921) R8.2@102.396,60.228 ; 102.109,60.921 ccw(c103.09,60.921) R8.2@102.396,60.228 ; 102.109,60.921 ccw(c103.09,60.921) R8.2@102.396,60.228 ; 102.109,60.921 ccw(c103.09,60.921) R8.2@102.396,60.228 ; 102.109,60.921 ccw(c103.09,60.921) R8.2@102.396,60.228 ; 102.109,60.921 ccw(c103.09,60.921) R8.2@102.396,60.228 ; 102.109,61.49 cw(c103.61,61.49) PB0~PB7.4@102.549,62.551 ; 102.109,61.49 cw(c103.61,61.49) PB0~PB7.4@102.549,62.551 ; 102.109,61.49 cw(c103.61,61.49) PB0~PB7.4@102.549,62.551 ; 102.109,61.49 cw(c103.61,61.49) PB0~PB7.4@102.549,62.551 ; 102.109,61.49 cw(c103.61,61.49) PB0~PB7.4@102.549,62.551 ; 102.109,61.49 cw(c103.61,61.49) PB0~PB7.4@102.549,62.551 ; 102.109,61.49 cw(c103.61,61.49) PB0~PB7.4@102.549,62.551 ; 102.109,61.535 ccw(c103.703,61.535) R8.2@102.576,60.407 ; 102.109,61.535 ccw(c103.703,61.535) R8.2@102.576,60.407 ; 102.109,61.535 ccw(c103.703,61.535) R8.2@102.576,60.407 ; 102.109,61.535 ccw(c103.703,61.535) R8.2@102.576,60.407 ; 102.109,61.535 ccw(c103.703,61.535) R8.2@102.576,60.407 ; 102.109,61.535 ccw(c103.703,61.535) R8.2@102.576,60.407 ; 102.109,61.535 ccw(c103.703,61.535) R8.2@102.576,60.407 ; 102.109,62.104 cw(c102.996,62.104) PB0~PB7.4@102.369,62.731 ; 102.109,62.104 cw(c102.996,62.104) PB0~PB7.4@102.369,62.731 ; 102.109,62.104 cw(c102.996,62.104) PB0~PB7.4@102.369,62.731 ; 102.109,62.104 cw(c102.996,62.104) PB0~PB7.4@102.369,62.731 ; 102.109,62.104 cw(c102.996,62.104) PB0~PB7.4@102.369,62.731 ; 102.109,62.104 cw(c102.996,62.104) PB0~PB7.4@102.369,62.731 ; 102.109,62.104 cw(c102.996,62.104) PB0~PB7.4@102.369,62.731
NetJP2_5: AVR.4 PB0~PB7.5 R7.2 | length 115.2
  Top Layer w0.254: AVR.4@99.568,67.818 PB0~PB7.5@99.568,62.992 PB0~PB7.5@99.568,62.992 R7.2@99.569,59.94 ; R7.2@99.102,60.407 ccw(c97.975,61.535) 99.569,61.535 ; R7.2@99.102,60.407 ccw(c97.975,61.535) 99.569,61.535 ; R7.2@99.102,60.407 ccw(c97.975,61.535) 99.569,61.535 ; R7.2@99.102,60.407 ccw(c97.975,61.535) 99.569,61.535 ; R7.2@99.102,60.407 ccw(c97.975,61.535) 99.569,61.535 ; R7.2@99.102,60.407 ccw(c97.975,61.535) 99.569,61.535 ; R7.2@99.102,60.407 ccw(c97.975,61.535) 99.569,61.535 ; PB0~PB7.5@99.127,62.551 cw(c98.062,61.486) 99.569,61.486 ; PB0~PB7.5@99.127,62.551 cw(c98.062,61.486) 99.569,61.486 ; PB0~PB7.5@99.127,62.551 cw(c98.062,61.486) 99.569,61.486 ; PB0~PB7.5@99.127,62.551 cw(c98.062,61.486) 99.569,61.486 ; PB0~PB7.5@99.127,62.551 cw(c98.062,61.486) 99.569,61.486 ; PB0~PB7.5@99.127,62.551 cw(c98.062,61.486) 99.569,61.486 ; PB0~PB7.5@99.127,62.551 cw(c98.062,61.486) 99.569,61.486 ; PB0~PB7.5@99.127,63.433 ccw(c98.064,64.496) 99.568,64.496 ; PB0~PB7.5@99.127,63.433 ccw(c98.064,64.496) 99.568,64.496 ; PB0~PB7.5@99.127,63.433 ccw(c98.064,64.496) 99.568,64.496 ; PB0~PB7.5@99.127,63.433 ccw(c98.064,64.496) 99.568,64.496 ; PB0~PB7.5@99.127,63.433 ccw(c98.064,64.496) 99.568,64.496 ; PB0~PB7.5@99.127,63.433 ccw(c98.064,64.496) 99.568,64.496 ; PB0~PB7.5@99.127,63.433 ccw(c98.064,64.496) 99.568,64.496 ; AVR.4@99.127,67.377 cw(c98.064,66.314) 99.568,66.314 ; AVR.4@99.127,67.377 cw(c98.064,66.314) 99.568,66.314 ; AVR.4@99.127,67.377 cw(c98.064,66.314) 99.568,66.314 ; AVR.4@99.127,67.377 cw(c98.064,66.314) 99.568,66.314 ; AVR.4@99.127,67.377 cw(c98.064,66.314) 99.568,66.314 ; AVR.4@99.127,67.377 cw(c98.064,66.314) 99.568,66.314 ; AVR.4@99.127,67.377 cw(c98.064,66.314) 99.568,66.314 ; R7.2@99.282,60.228 ccw(c98.588,60.921) 99.569,60.921 ; R7.2@99.282,60.228 ccw(c98.588,60.921) 99.569,60.921 ; R7.2@99.282,60.228 ccw(c98.588,60.921) 99.569,60.921 ; R7.2@99.282,60.228 ccw(c98.588,60.921) 99.569,60.921 ; R7.2@99.282,60.228 ccw(c98.588,60.921) 99.569,60.921 ; R7.2@99.282,60.228 ccw(c98.588,60.921) 99.569,60.921 ; R7.2@99.282,60.228 ccw(c98.588,60.921) 99.569,60.921 ; PB0~PB7.5@99.307,62.731 cw(c98.675,62.099) 99.569,62.099 ; PB0~PB7.5@99.307,62.731 cw(c98.675,62.099) 99.569,62.099 ; PB0~PB7.5@99.307,62.731 cw(c98.675,62.099) 99.569,62.099 ; PB0~PB7.5@99.307,62.731 cw(c98.675,62.099) 99.569,62.099 ; PB0~PB7.5@99.307,62.731 cw(c98.675,62.099) 99.569,62.099 ; PB0~PB7.5@99.307,62.731 cw(c98.675,62.099) 99.569,62.099 ; PB0~PB7.5@99.307,62.731 cw(c98.675,62.099) 99.569,62.099 ; PB0~PB7.5@99.307,63.253 ccw(c98.677,63.883) 99.568,63.883 ; PB0~PB7.5@99.307,63.253 ccw(c98.677,63.883) 99.568,63.883 ; PB0~PB7.5@99.307,63.253 ccw(c98.677,63.883) 99.568,63.883 ; PB0~PB7.5@99.307,63.253 ccw(c98.677,63.883) 99.568,63.883 ; PB0~PB7.5@99.307,63.253 ccw(c98.677,63.883) 99.568,63.883 ; PB0~PB7.5@99.307,63.253 ccw(c98.677,63.883) 99.568,63.883 ; PB0~PB7.5@99.307,63.253 ccw(c98.677,63.883) 99.568,63.883 ; AVR.4@99.307,67.557 cw(c98.677,66.927) 99.568,66.927 ; AVR.4@99.307,67.557 cw(c98.677,66.927) 99.568,66.927 ; AVR.4@99.307,67.557 cw(c98.677,66.927) 99.568,66.927 ; AVR.4@99.307,67.557 cw(c98.677,66.927) 99.568,66.927 ; AVR.4@99.307,67.557 cw(c98.677,66.927) 99.568,66.927 ; AVR.4@99.307,67.557 cw(c98.677,66.927) 99.568,66.927 ; AVR.4@99.307,67.557 cw(c98.677,66.927) 99.568,66.927 ; 99.568,63.883 ccw(c100.459,63.883) PB0~PB7.5@99.829,63.253 ; 99.568,63.883 ccw(c100.459,63.883) PB0~PB7.5@99.829,63.253 ; 99.568,63.883 ccw(c100.459,63.883) PB0~PB7.5@99.829,63.253 ; 99.568,63.883 ccw(c100.459,63.883) PB0~PB7.5@99.829,63.253 ; 99.568,63.883 ccw(c100.459,63.883) PB0~PB7.5@99.829,63.253 ; 99.568,63.883 ccw(c100.459,63.883) PB0~PB7.5@99.829,63.253 ; 99.568,63.883 ccw(c100.459,63.883) PB0~PB7.5@99.829,63.253 ; 99.568,64.496 ccw(c101.072,64.496) PB0~PB7.5@100.009,63.433 ; 99.568,64.496 ccw(c101.072,64.496) PB0~PB7.5@100.009,63.433 ; 99.568,64.496 ccw(c101.072,64.496) PB0~PB7.5@100.009,63.433 ; 99.568,64.496 ccw(c101.072,64.496) PB0~PB7.5@100.009,63.433 ; 99.568,64.496 ccw(c101.072,64.496) PB0~PB7.5@100.009,63.433 ; 99.568,64.496 ccw(c101.072,64.496) PB0~PB7.5@100.009,63.433 ; 99.568,64.496 ccw(c101.072,64.496) PB0~PB7.5@100.009,63.433 ; 99.568,66.314 cw(c101.072,66.314) AVR.4@100.009,67.377 ; 99.568,66.314 cw(c101.072,66.314) AVR.4@100.009,67.377 ; 99.568,66.314 cw(c101.072,66.314) AVR.4@100.009,67.377 ; 99.568,66.314 cw(c101.072,66.314) AVR.4@100.009,67.377 ; 99.568,66.314 cw(c101.072,66.314) AVR.4@100.009,67.377 ; 99.568,66.314 cw(c101.072,66.314) AVR.4@100.009,67.377 ; 99.568,66.314 cw(c101.072,66.314) AVR.4@100.009,67.377 ; 99.568,66.927 cw(c100.459,66.927) AVR.4@99.829,67.557 ; 99.568,66.927 cw(c100.459,66.927) AVR.4@99.829,67.557 ; 99.568,66.927 cw(c100.459,66.927) AVR.4@99.829,67.557 ; 99.568,66.927 cw(c100.459,66.927) AVR.4@99.829,67.557 ; 99.568,66.927 cw(c100.459,66.927) AVR.4@99.829,67.557 ; 99.568,66.927 cw(c100.459,66.927) AVR.4@99.829,67.557 ; 99.568,66.927 cw(c100.459,66.927) AVR.4@99.829,67.557 ; 99.569,60.921 ccw(c100.55,60.921) R7.2@99.856,60.228 ; 99.569,60.921 ccw(c100.55,60.921) R7.2@99.856,60.228 ; 99.569,60.921 ccw(c100.55,60.921) R7.2@99.856,60.228 ; 99.569,60.921 ccw(c100.55,60.921) R7.2@99.856,60.228 ; 99.569,60.921 ccw(c100.55,60.921) R7.2@99.856,60.228 ; 99.569,60.921 ccw(c100.55,60.921) R7.2@99.856,60.228 ; 99.569,60.921 ccw(c100.55,60.921) R7.2@99.856,60.228 ; 99.569,61.49 cw(c101.07,61.49) PB0~PB7.5@100.009,62.551 ; 99.569,61.49 cw(c101.07,61.49) PB0~PB7.5@100.009,62.551 ; 99.569,61.49 cw(c101.07,61.49) PB0~PB7.5@100.009,62.551 ; 99.569,61.49 cw(c101.07,61.49) PB0~PB7.5@100.009,62.551 ; 99.569,61.49 cw(c101.07,61.49) PB0~PB7.5@100.009,62.551 ; 99.569,61.49 cw(c101.07,61.49) PB0~PB7.5@100.009,62.551 ; 99.569,61.49 cw(c101.07,61.49) PB0~PB7.5@100.009,62.551 ; 99.569,61.535 ccw(c101.163,61.535) R7.2@100.036,60.407 ; 99.569,61.535 ccw(c101.163,61.535) R7.2@100.036,60.407 ; 99.569,61.535 ccw(c101.163,61.535) R7.2@100.036,60.407 ; 99.569,61.535 ccw(c101.163,61.535) R7.2@100.036,60.407 ; 99.569,61.535 ccw(c101.163,61.535) R7.2@100.036,60.407 ; 99.569,61.535 ccw(c101.163,61.535) R7.2@100.036,60.407 ; 99.569,61.535 ccw(c101.163,61.535) R7.2@100.036,60.407 ; 99.569,62.104 cw(c100.456,62.104) PB0~PB7.5@99.829,62.731 ; 99.569,62.104 cw(c100.456,62.104) PB0~PB7.5@99.829,62.731 ; 99.569,62.104 cw(c100.456,62.104) PB0~PB7.5@99.829,62.731 ; 99.569,62.104 cw(c100.456,62.104) PB0~PB7.5@99.829,62.731 ; 99.569,62.104 cw(c100.456,62.104) PB0~PB7.5@99.829,62.731 ; 99.569,62.104 cw(c100.456,62.104) PB0~PB7.5@99.829,62.731 ; 99.569,62.104 cw(c100.456,62.104) PB0~PB7.5@99.829,62.731
NetJP2_6: AVR.3 PB0~PB7.6 R6.2 | length 115.2
  Top Layer w0.254: AVR.3@97.028,67.818 PB0~PB7.6@97.028,62.992 PB0~PB7.6@97.028,62.992 R6.2@97.029,59.94 ; R6.2@96.562,60.407 ccw(c95.435,61.535) 97.029,61.535 ; R6.2@96.562,60.407 ccw(c95.435,61.535) 97.029,61.535 ; R6.2@96.562,60.407 ccw(c95.435,61.535) 97.029,61.535 ; R6.2@96.562,60.407 ccw(c95.435,61.535) 97.029,61.535 ; R6.2@96.562,60.407 ccw(c95.435,61.535) 97.029,61.535 ; R6.2@96.562,60.407 ccw(c95.435,61.535) 97.029,61.535 ; R6.2@96.562,60.407 ccw(c95.435,61.535) 97.029,61.535 ; PB0~PB7.6@96.587,62.551 cw(c95.522,61.486) 97.029,61.486 ; PB0~PB7.6@96.587,62.551 cw(c95.522,61.486) 97.029,61.486 ; PB0~PB7.6@96.587,62.551 cw(c95.522,61.486) 97.029,61.486 ; PB0~PB7.6@96.587,62.551 cw(c95.522,61.486) 97.029,61.486 ; PB0~PB7.6@96.587,62.551 cw(c95.522,61.486) 97.029,61.486 ; PB0~PB7.6@96.587,62.551 cw(c95.522,61.486) 97.029,61.486 ; PB0~PB7.6@96.587,62.551 cw(c95.522,61.486) 97.029,61.486 ; PB0~PB7.6@96.587,63.433 ccw(c95.524,64.496) 97.028,64.496 ; PB0~PB7.6@96.587,63.433 ccw(c95.524,64.496) 97.028,64.496 ; PB0~PB7.6@96.587,63.433 ccw(c95.524,64.496) 97.028,64.496 ; PB0~PB7.6@96.587,63.433 ccw(c95.524,64.496) 97.028,64.496 ; PB0~PB7.6@96.587,63.433 ccw(c95.524,64.496) 97.028,64.496 ; PB0~PB7.6@96.587,63.433 ccw(c95.524,64.496) 97.028,64.496 ; PB0~PB7.6@96.587,63.433 ccw(c95.524,64.496) 97.028,64.496 ; AVR.3@96.587,67.377 cw(c95.524,66.314) 97.028,66.314 ; AVR.3@96.587,67.377 cw(c95.524,66.314) 97.028,66.314 ; AVR.3@96.587,67.377 cw(c95.524,66.314) 97.028,66.314 ; AVR.3@96.587,67.377 cw(c95.524,66.314) 97.028,66.314 ; AVR.3@96.587,67.377 cw(c95.524,66.314) 97.028,66.314 ; AVR.3@96.587,67.377 cw(c95.524,66.314) 97.028,66.314 ; AVR.3@96.587,67.377 cw(c95.524,66.314) 97.028,66.314 ; R6.2@96.742,60.228 ccw(c96.048,60.921) 97.029,60.921 ; R6.2@96.742,60.228 ccw(c96.048,60.921) 97.029,60.921 ; R6.2@96.742,60.228 ccw(c96.048,60.921) 97.029,60.921 ; R6.2@96.742,60.228 ccw(c96.048,60.921) 97.029,60.921 ; R6.2@96.742,60.228 ccw(c96.048,60.921) 97.029,60.921 ; R6.2@96.742,60.228 ccw(c96.048,60.921) 97.029,60.921 ; R6.2@96.742,60.228 ccw(c96.048,60.921) 97.029,60.921 ; PB0~PB7.6@96.767,62.731 cw(c96.135,62.099) 97.029,62.099 ; PB0~PB7.6@96.767,62.731 cw(c96.135,62.099) 97.029,62.099 ; PB0~PB7.6@96.767,62.731 cw(c96.135,62.099) 97.029,62.099 ; PB0~PB7.6@96.767,62.731 cw(c96.135,62.099) 97.029,62.099 ; PB0~PB7.6@96.767,62.731 cw(c96.135,62.099) 97.029,62.099 ; PB0~PB7.6@96.767,62.731 cw(c96.135,62.099) 97.029,62.099 ; PB0~PB7.6@96.767,62.731 cw(c96.135,62.099) 97.029,62.099 ; PB0~PB7.6@96.767,63.253 ccw(c96.137,63.883) 97.028,63.883 ; PB0~PB7.6@96.767,63.253 ccw(c96.137,63.883) 97.028,63.883 ; PB0~PB7.6@96.767,63.253 ccw(c96.137,63.883) 97.028,63.883 ; PB0~PB7.6@96.767,63.253 ccw(c96.137,63.883) 97.028,63.883 ; PB0~PB7.6@96.767,63.253 ccw(c96.137,63.883) 97.028,63.883 ; PB0~PB7.6@96.767,63.253 ccw(c96.137,63.883) 97.028,63.883 ; PB0~PB7.6@96.767,63.253 ccw(c96.137,63.883) 97.028,63.883 ; AVR.3@96.767,67.557 cw(c96.137,66.927) 97.028,66.927 ; AVR.3@96.767,67.557 cw(c96.137,66.927) 97.028,66.927 ; AVR.3@96.767,67.557 cw(c96.137,66.927) 97.028,66.927 ; AVR.3@96.767,67.557 cw(c96.137,66.927) 97.028,66.927 ; AVR.3@96.767,67.557 cw(c96.137,66.927) 97.028,66.927 ; AVR.3@96.767,67.557 cw(c96.137,66.927) 97.028,66.927 ; AVR.3@96.767,67.557 cw(c96.137,66.927) 97.028,66.927 ; 97.028,63.883 ccw(c97.919,63.883) PB0~PB7.6@97.289,63.253 ; 97.028,63.883 ccw(c97.919,63.883) PB0~PB7.6@97.289,63.253 ; 97.028,63.883 ccw(c97.919,63.883) PB0~PB7.6@97.289,63.253 ; 97.028,63.883 ccw(c97.919,63.883) PB0~PB7.6@97.289,63.253 ; 97.028,63.883 ccw(c97.919,63.883) PB0~PB7.6@97.289,63.253 ; 97.028,63.883 ccw(c97.919,63.883) PB0~PB7.6@97.289,63.253 ; 97.028,63.883 ccw(c97.919,63.883) PB0~PB7.6@97.289,63.253 ; 97.028,64.496 ccw(c98.532,64.496) PB0~PB7.6@97.469,63.433 ; 97.028,64.496 ccw(c98.532,64.496) PB0~PB7.6@97.469,63.433 ; 97.028,64.496 ccw(c98.532,64.496) PB0~PB7.6@97.469,63.433 ; 97.028,64.496 ccw(c98.532,64.496) PB0~PB7.6@97.469,63.433 ; 97.028,64.496 ccw(c98.532,64.496) PB0~PB7.6@97.469,63.433 ; 97.028,64.496 ccw(c98.532,64.496) PB0~PB7.6@97.469,63.433 ; 97.028,64.496 ccw(c98.532,64.496) PB0~PB7.6@97.469,63.433 ; 97.028,66.314 cw(c98.532,66.314) AVR.3@97.469,67.377 ; 97.028,66.314 cw(c98.532,66.314) AVR.3@97.469,67.377 ; 97.028,66.314 cw(c98.532,66.314) AVR.3@97.469,67.377 ; 97.028,66.314 cw(c98.532,66.314) AVR.3@97.469,67.377 ; 97.028,66.314 cw(c98.532,66.314) AVR.3@97.469,67.377 ; 97.028,66.314 cw(c98.532,66.314) AVR.3@97.469,67.377 ; 97.028,66.314 cw(c98.532,66.314) AVR.3@97.469,67.377 ; 97.028,66.927 cw(c97.919,66.927) AVR.3@97.289,67.557 ; 97.028,66.927 cw(c97.919,66.927) AVR.3@97.289,67.557 ; 97.028,66.927 cw(c97.919,66.927) AVR.3@97.289,67.557 ; 97.028,66.927 cw(c97.919,66.927) AVR.3@97.289,67.557 ; 97.028,66.927 cw(c97.919,66.927) AVR.3@97.289,67.557 ; 97.028,66.927 cw(c97.919,66.927) AVR.3@97.289,67.557 ; 97.028,66.927 cw(c97.919,66.927) AVR.3@97.289,67.557 ; 97.029,60.921 ccw(c98.01,60.921) R6.2@97.316,60.228 ; 97.029,60.921 ccw(c98.01,60.921) R6.2@97.316,60.228 ; 97.029,60.921 ccw(c98.01,60.921) R6.2@97.316,60.228 ; 97.029,60.921 ccw(c98.01,60.921) R6.2@97.316,60.228 ; 97.029,60.921 ccw(c98.01,60.921) R6.2@97.316,60.228 ; 97.029,60.921 ccw(c98.01,60.921) R6.2@97.316,60.228 ; 97.029,60.921 ccw(c98.01,60.921) R6.2@97.316,60.228 ; 97.029,61.49 cw(c98.53,61.49) PB0~PB7.6@97.469,62.551 ; 97.029,61.49 cw(c98.53,61.49) PB0~PB7.6@97.469,62.551 ; 97.029,61.49 cw(c98.53,61.49) PB0~PB7.6@97.469,62.551 ; 97.029,61.49 cw(c98.53,61.49) PB0~PB7.6@97.469,62.551 ; 97.029,61.49 cw(c98.53,61.49) PB0~PB7.6@97.469,62.551 ; 97.029,61.49 cw(c98.53,61.49) PB0~PB7.6@97.469,62.551 ; 97.029,61.49 cw(c98.53,61.49) PB0~PB7.6@97.469,62.551 ; 97.029,61.535 ccw(c98.623,61.535) R6.2@97.496,60.407 ; 97.029,61.535 ccw(c98.623,61.535) R6.2@97.496,60.407 ; 97.029,61.535 ccw(c98.623,61.535) R6.2@97.496,60.407 ; 97.029,61.535 ccw(c98.623,61.535) R6.2@97.496,60.407 ; 97.029,61.535 ccw(c98.623,61.535) R6.2@97.496,60.407 ; 97.029,61.535 ccw(c98.623,61.535) R6.2@97.496,60.407 ; 97.029,61.535 ccw(c98.623,61.535) R6.2@97.496,60.407 ; 97.029,62.104 cw(c97.916,62.104) PB0~PB7.6@97.289,62.731 ; 97.029,62.104 cw(c97.916,62.104) PB0~PB7.6@97.289,62.731 ; 97.029,62.104 cw(c97.916,62.104) PB0~PB7.6@97.289,62.731 ; 97.029,62.104 cw(c97.916,62.104) PB0~PB7.6@97.289,62.731 ; 97.029,62.104 cw(c97.916,62.104) PB0~PB7.6@97.289,62.731 ; 97.029,62.104 cw(c97.916,62.104) PB0~PB7.6@97.289,62.731 ; 97.029,62.104 cw(c97.916,62.104) PB0~PB7.6@97.289,62.731